# Altium PCB lv.4.PcbDoc
Units mm, origin at the board's own origin, x right, y up, seen from the top; angles counter-clockwise.
Board outline 50.29 x 30.86 mm, 2 copper layers (Top Layer, Bottom Layer); 27 components, 17 nets, 96 pads, 2 vias.
Unrouted connection lines stored in the file: 64.
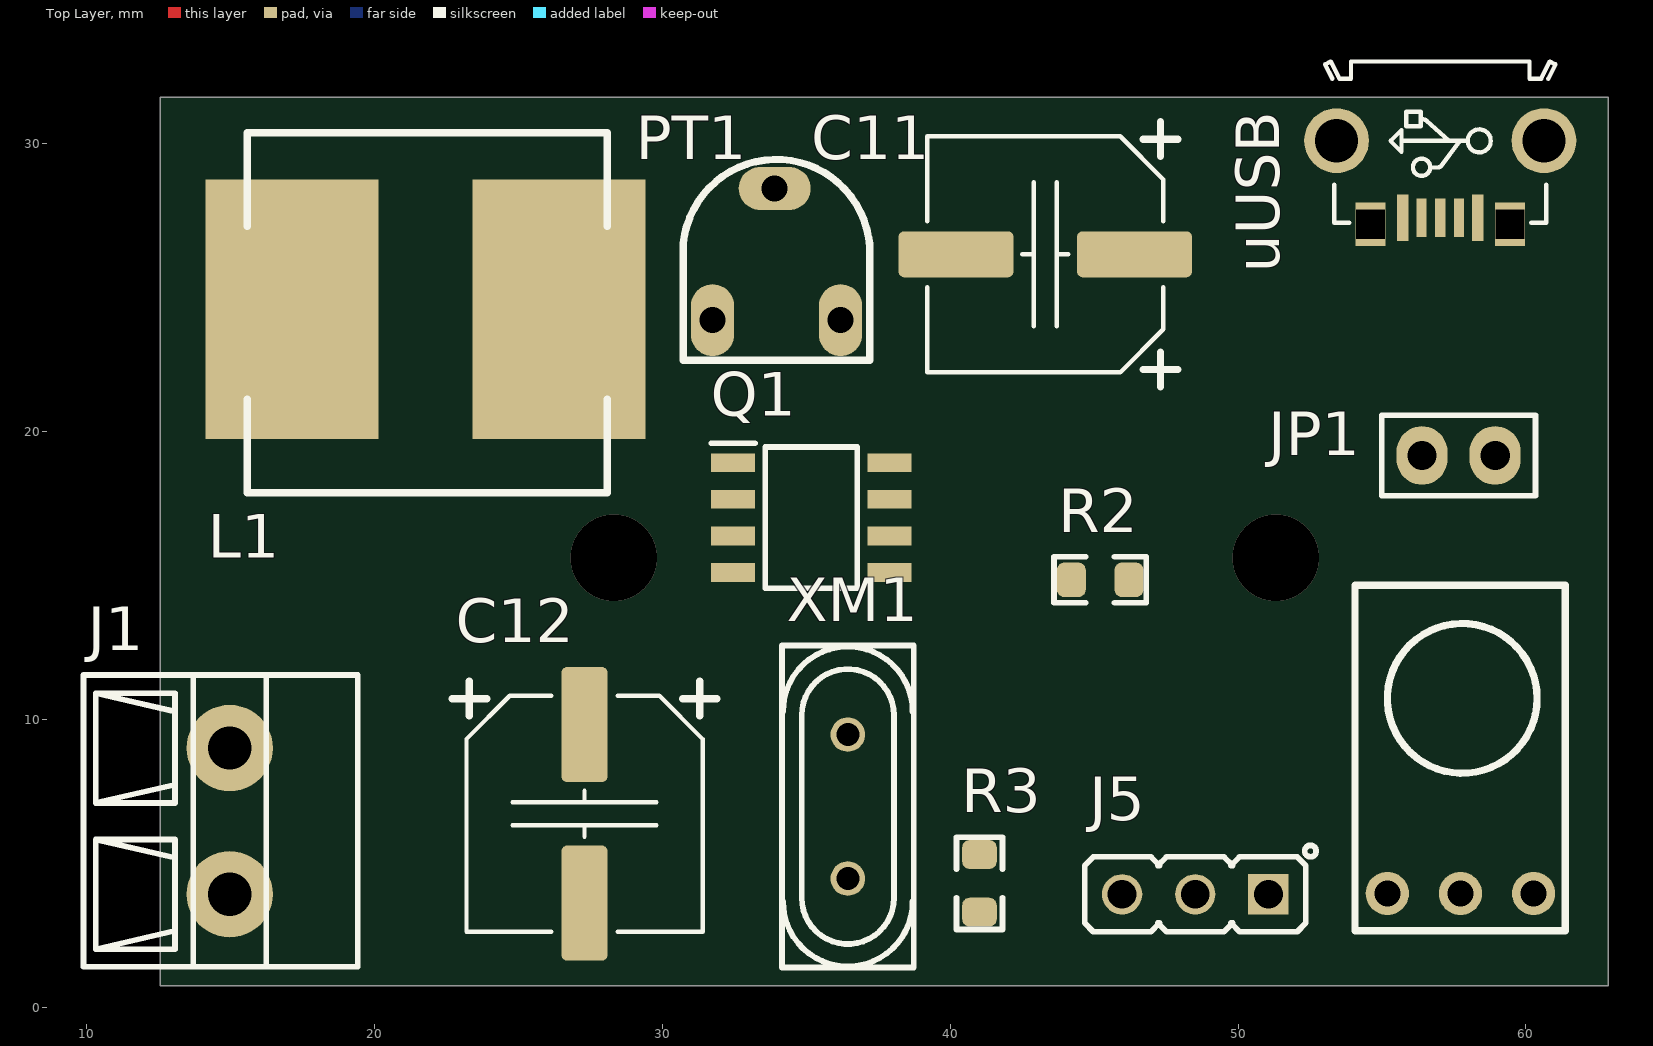
[diagram p0: Top Layer view]
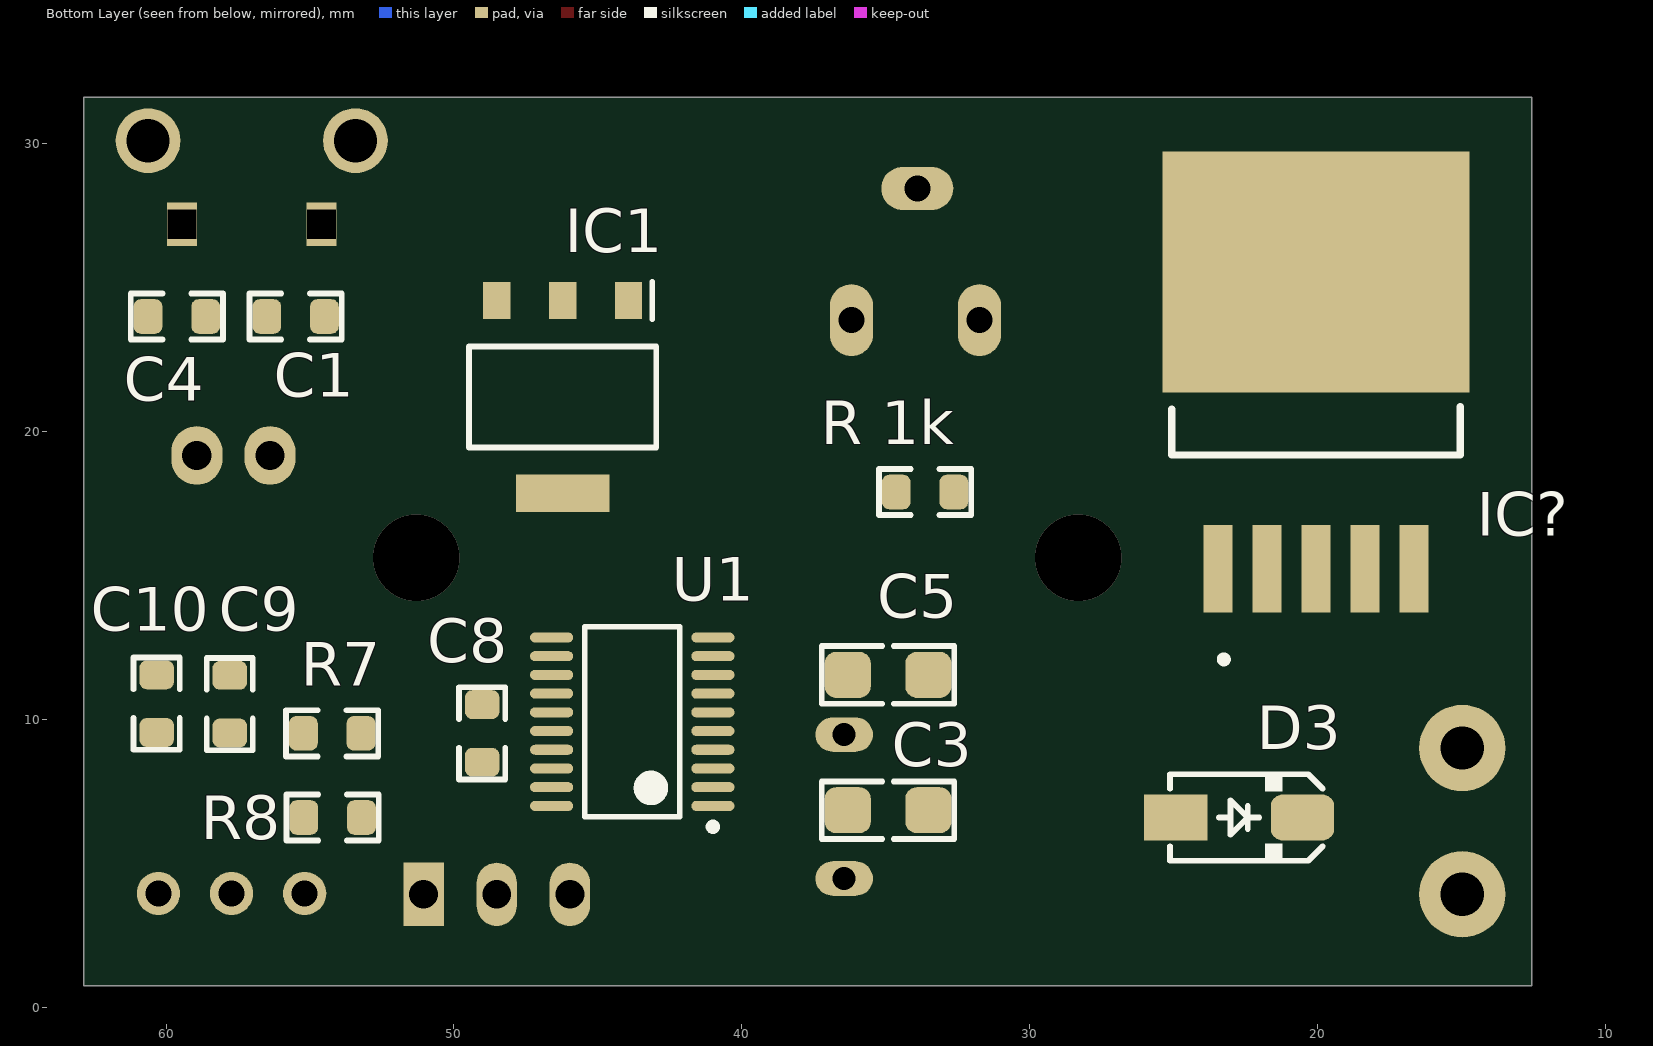
[diagram p1: Bottom Layer view, seen from below]

## Layer stack, top to bottom
Top Solder: solder mask 0.0102, Solder Resist, Dk 3.5
Top Layer: signal copper 0.0356
Dielectric 1: dielectric 0.32, FR-4, Dk 4.8
Bottom Layer: signal copper 0.0356
Bottom Solder: solder mask 0.0102, Solder Resist, Dk 3.5

## Board outline
12.573,31.623 62.865,31.623 62.865,0.762 12.573,0.762

## Design rules (kind name [scope] priority, off if disabled: settings)
Clearance [All] p1: gap=0.254 ignorepadtopadclearanceinfootprint=FALSE except(0: Arc-Hole Track-Hole SMDPad-Hole THPad-Hole Via-Hole Fill-Hole Poly-Hole Region-Hole Text-Hole)
PolygonConnect [All] p1: connectstyle=Relief reliefconductorwidth=0.254 reliefentries=4 polygonreliefangle="90 Angle" airgapwidth=0.254
RoutingVias [All] p1: holewidth=0.711 width=1.27 viastyle="Through Hole" minholewidth=0.711 minwidth=1.27 maxholewidth=0.711 maxwidth=1.27
SolderMaskExpansion [All] p1: expansion=0.102
Width [All] p1: maxlimit=0.254 minlimit=0.254 preferedwidth=0.254
30 further rules are at their usual default settings.

## Classes and differential pairs
component class Lampi: C1 C3 C4 C5 C8 C9 C10 IC1 J5 JP1 R2 R3 R7 R8
component class lampi_power: C11 C12 D3 IC? J1 L1 PT1 Q1 "R 1k"

## Components (designator, comment, footprint, x,y, rotation, side; value= is the part's Value field where it differs from the comment)
C1 "100nF" 0805C 55.499,24.003 r0 bottom
C3 "20pF" 1206C 34.925,6.858 r180 bottom
C4 "10uF" 0805C 59.623,24.003 r180 bottom
C5 "20pF" 1206C 34.925,11.557 r180 bottom
C8 "100nF" 0805C 49.022,9.525 r270 bottom
C9 "100nf" 0805C 57.785,10.541 r90 bottom
C10 "10uf" 0805C 60.325,10.557 r90 bottom
C11 "C 220uF" CAP_ELEC_SIZE_E 43.307,26.162 r90 top
C12 "100uF" CAP_ELEC_SIZE_E 27.305,6.731 r180 top
D3 "1N5819" 430X270D 22.733,6.604 r180 bottom
IC1 "ams1117-3.3v" SOT229P700X180-4N 46.228,21.209 r270 bottom
IC? "XL6009" D2TSUFFIX-CASE936A-02-ISSUEC 25.076,28.395 r270 bottom
J1 "Terminal" TB_2 14.986,6.477 r270 top
J5 "HDR_BUSEL" HDR_1x3 48.514,3.937 r180 top
JP1 "Header 2" "COMM HEADER 2" 57.658,19.177 r180 top
L1 "33UH" SRR1260-150M 21.844,24.13 r180 top
PT1 "POT3" POT3 30.734,22.479 r0 top
Q1 "IRF7317PBF" SOIC127P600X175-8N 35.179,17.018 r0 top
R2 "10k" 0805L 45.212,14.859 r0 top
R3 "100" 0805L 41.021,4.318 r270 top
R7 "100R" 0805L 54.229,9.525 r180 bottom value=100r
R8 "22K OPTIONAL" 0805L 54.213,6.604 r0 bottom
"R 1k" "*" 0805L 33.639,17.907 r180 bottom
U1 "STM32F030F4P6" STM-TSSOP20_L 43.809,9.932 r0 bottom
uUSB "micro usb dip" MICRO_USB_DIP 57.023,30.099 r180 top
XM1 "8MHz" XTLT_2 36.449,6.985 r90 top
? "RYS1838T" RYS1838T 57.785,9.541 r0 top

## Footprints (in the part's own frame and the unit in brackets; to place one, negate y for a bottom-side part, rotate by r counter-clockwise, add the part's x,y. Pads: shape width x height; smd on the part's side, far side on the other; paste and mask are expansions set on the pad)
430X270D [mm] "SMA Molded Diode, 2-Leads, Body 4.3x2.7mm"
  rect 2.2x1.6 smd: 1(-2.2,0)
  rrect50% 2.2x1.6 smd: 2(2.2,0)
  silkscreen extent -2.4,-1.5 2.9,1.5, body extent -2.75,-1.4 2.75,1.4, height 2.6
0805C [mm] ",0805, 2012, 200X130"
  rrect50% 1x1.2 smd mask+0.075: 1(-1,0) 2(1,0)
  Top Layer pour cut-out: -0.5,0.8 0.5,0.8 0.5,-0.8 -0.5,-0.8
  silkscreen extent -1.6,-0.8 1.6,0.8, body extent -1,-0.63 1,0.63, height 1
0805L [mm] ",0805, 2012, 200X130"
  rrect50% 1x1.2 smd mask+0.075: 1(-1,0) 2(1,0)
  Top Layer pour cut-out: -0.5,0.8 0.5,0.8 0.5,-0.8 -0.5,-0.8
  silkscreen extent -1.6,-0.8 1.6,0.8, body extent -1,-0.6 1,0.6, height 0.95
1206C [mm] "Molded/Chip Capacitor, 2-Leads, Body 3.2x1.6mm, IPC Medium Density, 3216, 320X160"
  rrect50% 1.6x1.6 smd mask+0.075: 1(-1.4,0) 2(1.4,0)
  Top Layer pour cut-out: -0.8,1 -0.8,-1 0.8,-1 0.8,1
  silkscreen extent -2.3,-1 2.3,1, body extent -1.6,-0.8 1.6,0.8, height 1
CAP_ELEC_SIZE_E [mm] "Capacitor, polarized, aluminum can; 8.0x6.2mm DxH"
  round 0.635 on Mech15: 0(0,0)
  rrect25% 1.6x4 smd: 1(0,-3.1) 2(0,3.1)
  silkscreen extent -4.6,-4.6 4.6,4.1, body extent -4.25,-4.75 4.25,4.75, height 6.5
"COMM HEADER 2" [mil] "Communication Header Connector 2 pin"
  oval 70x80 hole 40: 1(-50,0) 2(50,0)
  silkscreen extent -105,-55 105,55, body extent -100,-119 100,131, height 413
D2TSUFFIX-CASE936A-02-ISSUEC [mm]
  rect 3.05x1.016 smd: 1(13.155,1.606) 2(13.155,3.308) 3(13.155,5.01) 4(13.155,6.712) 5(13.155,8.414)
  rect 8.38x10.66 smd: 6(2.85,5.01)
  silkscreen extent 7.52,0 16.42,10.02
HDR_1x3 [mm]
  rect 1.4x1.4 / inner rect 1.4x1.4 / far side rect 1.4x2.2 hole 1 mask+0.1: 1(-2.54,0)
  round 1.4 / inner round 1.4 / far side oval 1.4x2.2 hole 1 mask+0.1: 2(0,0) 3(2.54,0)
  silkscreen extent -4.2,-1.7 3.84,1.3, body extent -3.82,-1.46 3.8,1.46, height 8.61
MICRO_USB_DIP [mm]
  rect 0.4x1.6 smd: 1(-1.3,2.666) 5(1.3,2.666)
  rect 0.35x1.35 smd: 2(-0.65,2.666) 3(0,2.666) 4(0.65,2.666)
  rect 1.05x1.5 hole 1 square: 6(2.425,2.891) 9(-2.425,2.891)
  round 2.25 hole 1.5: 7(3.6,-0.009) 8(-3.6,-0.009)
  Mechanical 8 keep-out region: 3.75,0.741 3.75,1.941 -3.75,1.941 -3.75,0.741
  Mechanical 8 keep-out region: 2.85,-0.759 2.85,0.741 -2.85,0.741 -2.85,-0.759
  Mechanical 8 keep-out region: 3.75,-2.159 3.75,-0.759 -3.75,-0.759 -3.75,-2.159
  silkscreen extent -4,-2.76 4,2.84, body extent -4,-2.81 4,2.79, height 2.73
POT3 [mm]
  oval 1.5x2.5 hole 0.9: 1(1.016,1.397) 2(5.461,1.397)
  oval 2.5x1.5 hole 0.9: 3(3.175,5.969)
  silkscreen extent 0,0 6.48,6.98
RYS1838T [mm]
  round 1.5 hole 0.9: 1(-2.6,-5.575) 2(-0.06,-5.575) 3(2.48,-5.575)
  silkscreen extent -3.72,-6.88 3.57,5.13
SOIC127P600X175-8N [mm]
  rect 1.525x0.65 smd: 1(-2.712,1.905) 2(-2.712,0.635) 3(-2.712,-0.635) 4(-2.712,-1.905) 5(2.712,-1.905) 6(2.712,-0.635) 7(2.712,0.635) 8(2.712,1.905)
  silkscreen extent -3.47,-2.45 1.6,2.58, body extent -3,-2.45 3,2.45, height 1.75
SOT229P700X180-4N [mm]
  rect 1.3x0.95 smd: 1(-3.35,2.29) 2(-3.35,0) 3(-3.35,-2.29)
  rect 1.3x3.25 smd: 4(3.35,0)
  silkscreen extent -4,-3.25 1.75,3.25, body extent -3.5,-3.25 3.5,3.25, height 1.8
SRR1260-150M [mm]
  rect 6x9 smd: 1(-4.572,-0.127) 2(4.699,-0.127)
  silkscreen extent -6.25,-6.25 6.25,6.25
STM-TSSOP20_L [mm] "SOP, 20-Leads, Body 6.6x4.5mm, Pitch 0.65mm, IPC High Density"
  oval 1.5x0.35 smd: 1(-2.8,2.925) 2(-2.8,2.275) 3(-2.8,1.625) 4(-2.8,0.975) 5(-2.8,0.325) 6(-2.8,-0.325) 7(-2.8,-0.975) 8(-2.8,-1.625) 9(-2.8,-2.275) 10(-2.8,-2.925) 11(2.8,-2.925) 12(2.8,-2.275) 13(2.8,-1.625) 14(2.8,-0.975) 15(2.8,-0.325) 16(2.8,0.325) 17(2.8,0.975) 18(2.8,1.625) 19(2.8,2.275) 20(2.8,2.925)
  silkscreen extent -2.92,-3.3 1.65,3.77, body extent -2.25,-3.3 2.25,3.3, height 1.2
TB_2 [mm] "Terminal Block"
  round 3 hole 1.5: 1(-2.54,0) 2(2.54,0)
  silkscreen extent -5.08,-5.08 5.05,4.45, body extent -5,-5 5,5.5, height 14
XTLT_2 [mm] "Crystal PTH HC49S"
  round 1.2 / inner oval 1.2x2 / far side oval 1.2x2 hole 0.8: 1(-2.5,0)
  round 1.2 / inner round 1.2 / far side oval 1.2x2 hole 0.8: 2(2.5,0)
  silkscreen extent -5.59,-2.29 5.59,2.29, body extent -5.67,-2.32 5.67,2.33, height 3.6

## Part data
C1 C8: library part Cap
C3 C5 C9 C10: library part Cap, "Capacitor"
C4: library part Cap, "100nF"
C11 C12: library part UCW1V221MNL1GS, "Capacitor Polarised", Manufacturer_Name=Nichicon, Mouser Part Number=647-UCW1V221MNL1GS, RS Part Number=7151745P, Allied_Number=70409419, Allied Price/Stock=https://www.alliedelec.com/nichicon-ucw1v221mnl1gs/70409419/, Datasheet Link=http://www.nichicon.co.jp/english/products/pdfs/e-ucw.pdf, Manufacturer_Part_Number=UCW1V221MNL1GS, Mouser Price/Stock=https://www.mouser.com/Search/Refine.aspx?Keyword=647-UCW1V221MNL1GS, RS Price/Stock=http://uk.rs-online.com/web/p/products/7151745P
IC1: "Integrated Circuit", Manufacturer_Name="Advanced Monolithic Systems", Datasheet Link=http://www.advanced-monolithic.com/pdf/ds1117.pdf, Height=1.8mm, Manufacturer_Part_Number=ams1117-3.3v
IC?: "Integrated Circuit", Manufacturer_Name="Texas Instruments", Manufacturer_Part_Number=LM2577SX-ADJ/NOPB, Mouser Part Number=926-LM2577SXADJNOPB, Datasheet Link=http://www.ti.com/lit/gpn/LM2577, Mouser Price/Stock=https://www.mouser.com/Search/Refine.aspx?Keyword=926-LM2577SXADJNOPB
J1: library part CON2
J5: library part "header 1x3"
JP1: "Header, 2-Pin", LatestRevisionDate=17-Jul-2002, LatestRevisionNote="Re-released for DXP Platform.", Publisher="Altium Limited"
L1: library part SRR1260-330M, "Inductor", Manufacturer_Name=Bourns, Mouser Part Number=652-SRR1260-330M, RS Part Number=6934619P, Allied_Number=70277066, Allied Price/Stock=https://www.alliedelec.com/bourns-srr1260-330m/70277066/, Datasheet Link=https://www.bourns.com/docs/Product-Datasheets/SRR1260.pdf, Manufacturer_Part_Number=SRR1260-330M, Mouser Price/Stock=https://www.mouser.com/Search/Refine.aspx?Keyword=652-SRR1260-330M, RS Price/Stock=http://uk.rs-online.com/web/p/products/6934619P
PT1: "Variable Potentiometer top adjust", Designer="Seyed Mohsen Ghasemian", WEB=www.picpars.com
Q1: "Transistor", Manufacturer_Name=Infineon, Mouser Part Number=942-IRF7317PBF, RS Part Number=5410317P, Allied_Number=70018231, Allied Price/Stock=https://www.alliedelec.com/infineon-irf7317pbf/70018231/, Datasheet Link=http://www.infineon.com/dgdl/irf7317pbf.pdf?fileId=5546d462533600a4015355f5b8de1b3d, Height=1.75mm, Manufacturer_Part_Number=IRF7317PBF, Mouser Price/Stock=https://www.mouser.com/Search/Refine.aspx?Keyword=942-IRF7317PBF, RS Price/Stock=http://uk.rs-online.com/web/p/products/5410317P
R2 R3 R7 R8 "R 1k": library part R
U1: "ARM Cortex-M0 32-bit MCU, 16 KB Flash, 4 KB Internal RAM, 15 I/Os, 20-pin TSSOP, -40 to 85 degC, Tube", I/Os (High Current)=15, Operating Frequency(F) (Processor speed) (MHz)=48, Supplier Part Number 1=497-14044-5-ND, Supply Voltage(Vcc) min (V)=2.4, ComponentLink1Description="Manufacturer URL", ComponentLink1URL=http://www.st.com/web/en/home.html, ComponentLink2Description=Datasheet, ComponentLink2URL=http://www.st.com/st-web-ui/static/active/en/resource/technical/document/datasheet/DM00088500.pdf, ComponentLink3Description="Package Specification", ComponentLink3URL=http://www.st.com/st-web-ui/static/active/en/resource/technical/document/datasheet/DM00065136.pdf, Core="ARM Cortex-M0", DatasheetVersion="Rev. 1", FLASH Size (Prog) (kB)=16, Internal RAM Size (kB)=4, Mounting Technology="Surface Mount", PackageDescription="20-Pin Thin Shrink Small Outline Package, 6.5 x 4.4 mm Body, 0.65 mm Pitch", PackageReference=TSSOP20, PackageVersion="Rev. 1, 11/2012", Packing=Tube, PartNumber=STM32F030F4P6, Supplier 1=Digi-Key, Supplier 2=Newark, Supplier 3=Mouser, Supplier Part Number 2=06X3648, Supplier Part Number 3=511-STM32F030F4P6
XM1: library part XTAL

## Via types
v1: diameter 3, hole 3, Top Layer to Bottom Layer, 2 vias

## Nets (pads, with @x,y where several pads share a name; then routed paths per layer and width w, separated by ;. In a path a pad name is that pad's centre, name@x,y a point inside that pad or via, vN(x,y) a via of type N, cw(c..) or ccw(c..) an arc to the next point about the centre after c; other vN are vias at no path point)
3V: C8.2 IC1.2 IC1.4 R2.2 R7.2 R8.1 U1.5 U1.16
5USB: C11.1 IC1.3 IC?.4 JP1.2 L1.1 Q1.3
EN: IC?.2 Q1.5 Q1.6 Q1.7 Q1.8
GND: "R 1k.1" ?.2 C1.1 C3.2 C4.1 C5.2 C8.1 C9.2 C10.2 C11.2 C12.2 IC1.1 IC?.1 J1.2 J5.1 Q1.1 R3.1 U1.15 uUSB.5 uUSB.6 uUSB.7 uUSB.8 uUSB.9
IR_R: ?.1 R8.2 U1.12
LED_Driver: Q1.2 Q1.4 U1.17
Net_3: ?.3 C9.1 C10.1 R7.1
NetC12_1: C12.1 D3.2 J1.1 PT1.3
NetD3_1: D3.1 IC?.3 IC?.6 L1.2
NetIC?_5: "R 1k.2" IC?.5 PT1.2
NetR3_2: R3.2 U1.1
NRST: R2.1 U1.4
OSC_IN: C3.1 U1.2 XM1.1
OSC_OUT: C5.1 U1.3 XM1.2
SWCLK: J5.3 U1.20
SWDIO: J5.2 U1.19
USB: C1.2 C4.2 JP1.1 uUSB.1
pads on no net: C11.0 C12.0 PT1.1 U1.6 U1.7 U1.8 U1.9 U1.10 U1.11 U1.13 U1.14 U1.18 uUSB.2 uUSB.3 uUSB.4
copper on no net:
  other v1: 28.321,15.621 51.308,15.621